# Altium PCB PCB.PcbDoc
Units mm, origin at the board's own origin, x right, y up, seen from the top; angles counter-clockwise.
Board outline 26 x 21 mm, 2 copper layers (Top Layer, Bottom Layer); 24 components, 29 nets, 106 pads, 15 vias.
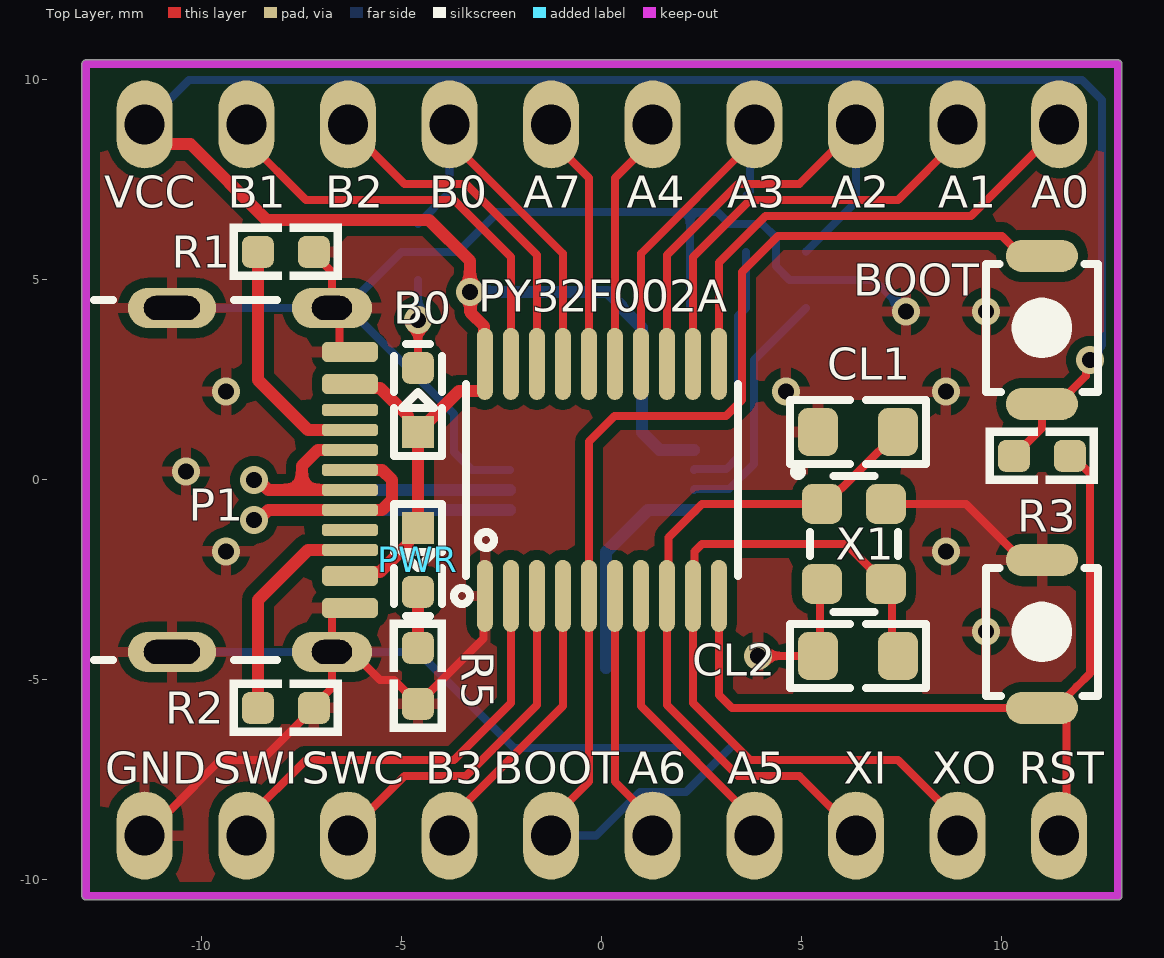
[diagram p0: Top Layer view]
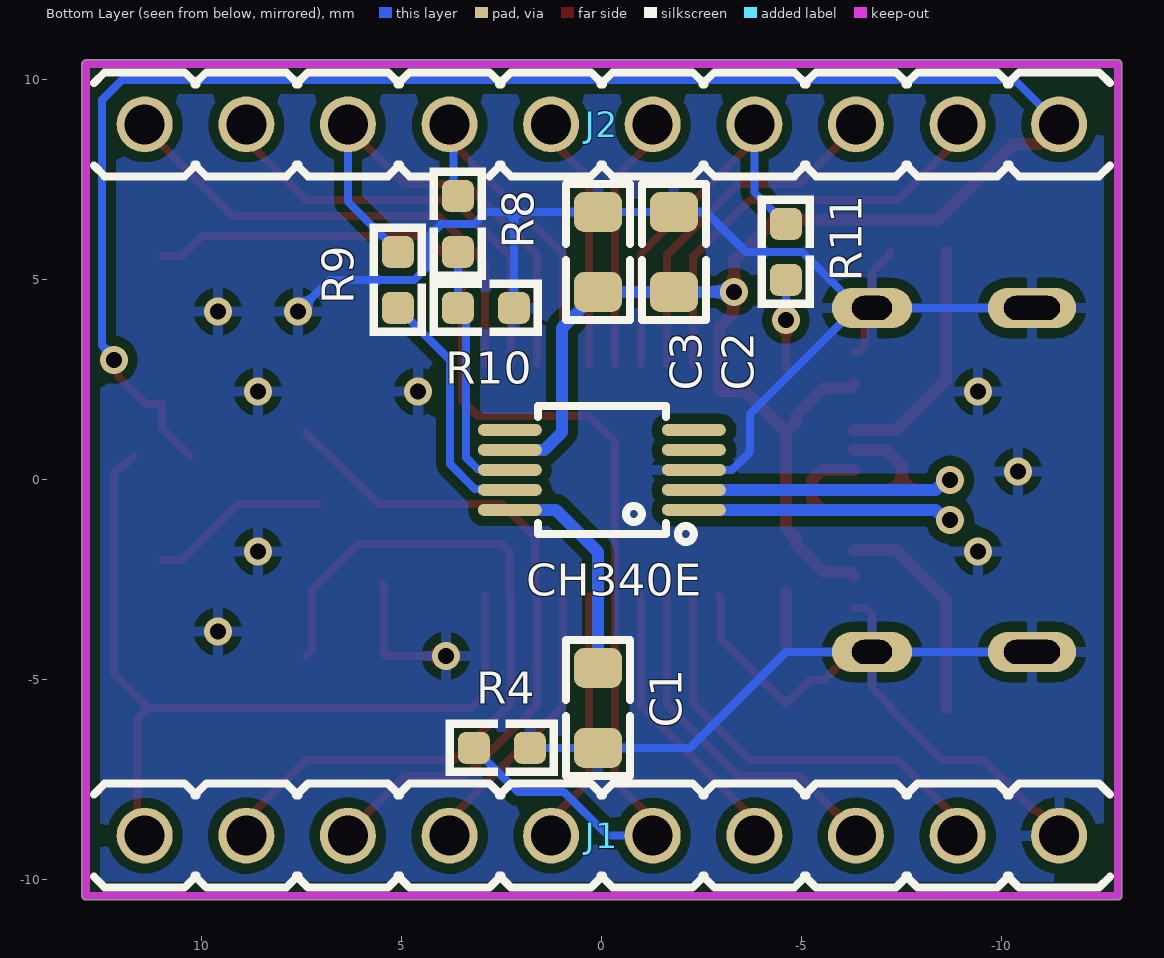
[diagram p1: Bottom Layer view, seen from below]
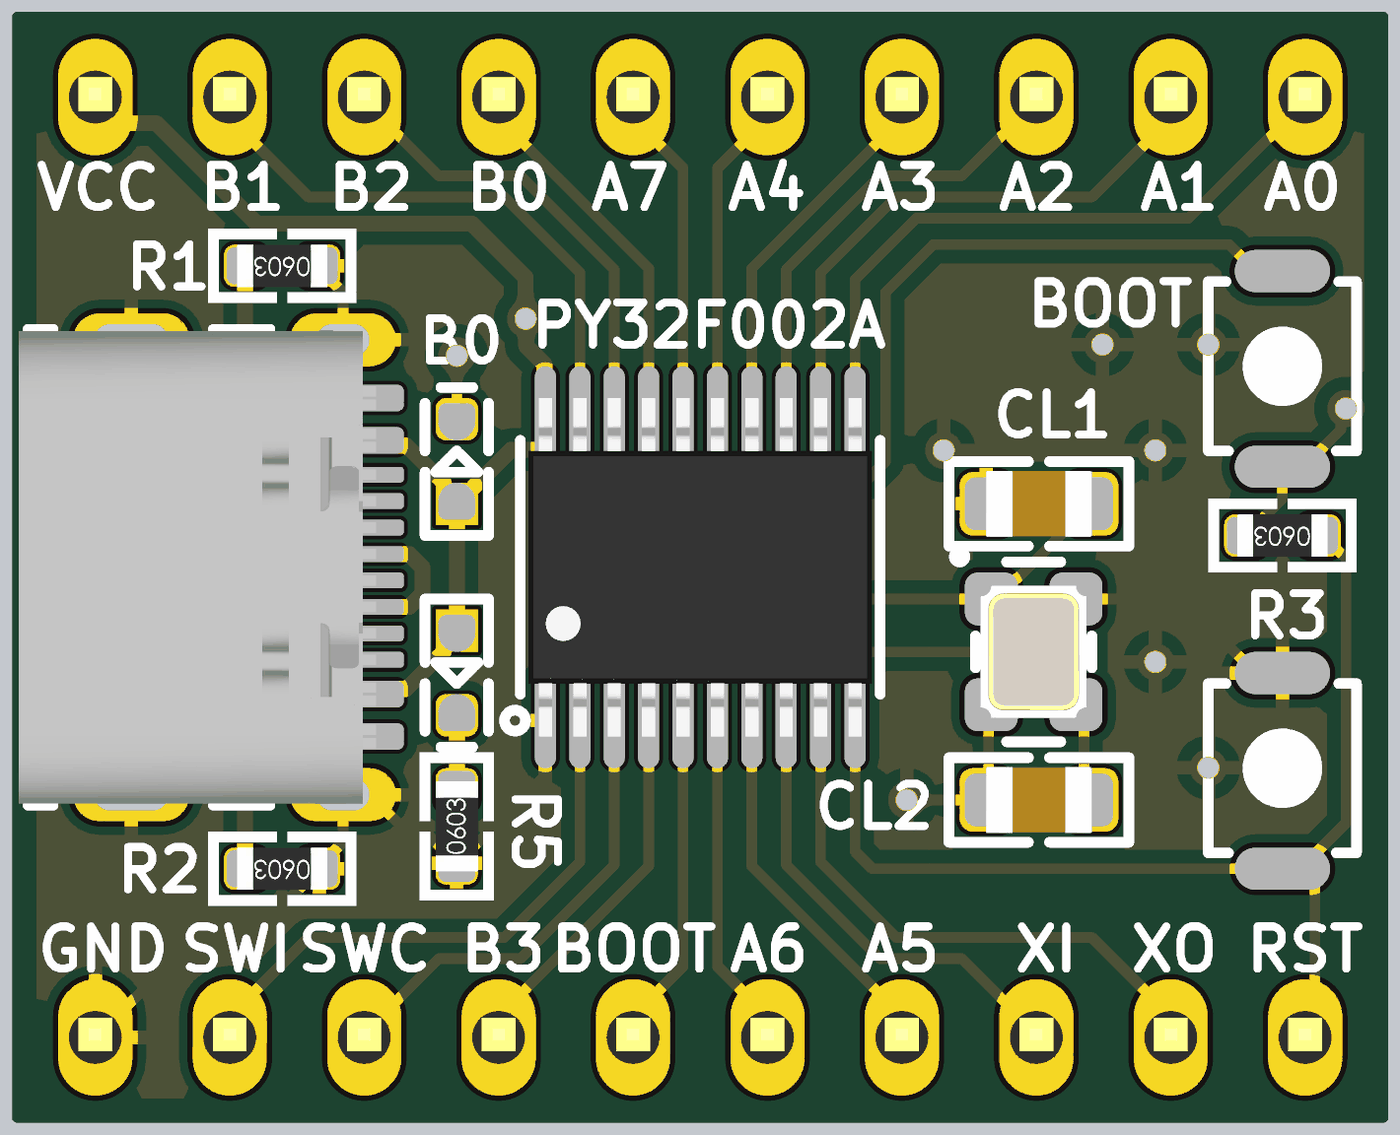
[diagram p2: 3D render of the assembled board from above, using the file's embedded part models]
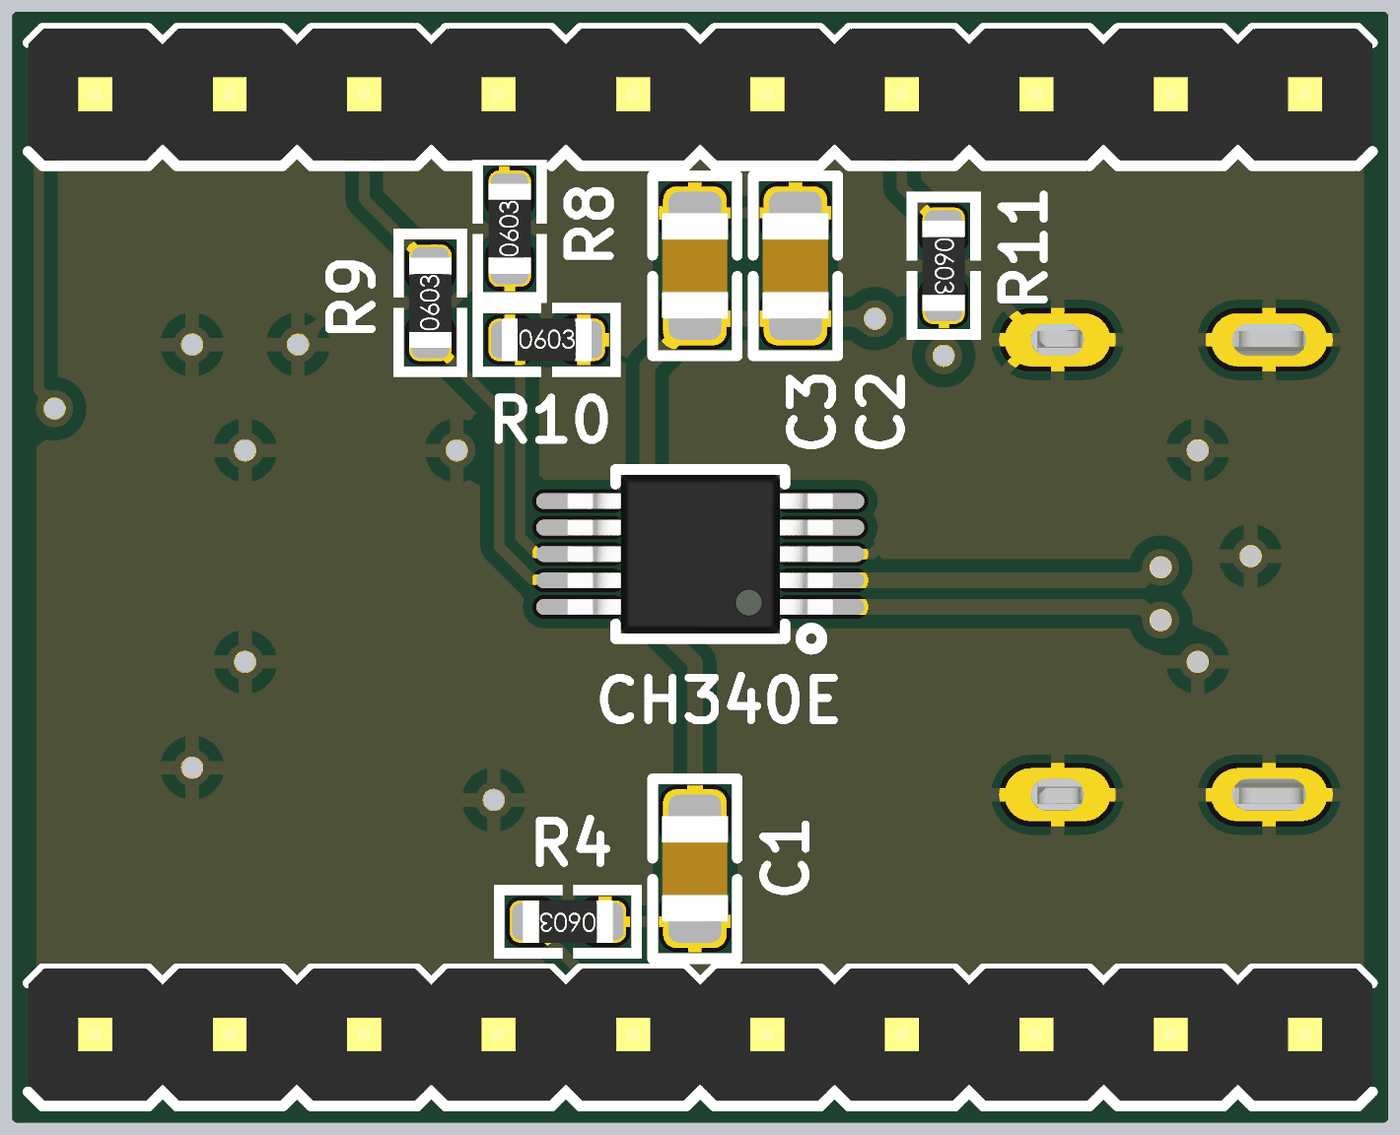
[diagram p3: 3D render of the assembled board from below, using the file's embedded part models]

## Layer stack, top to bottom
Top Solder: solder mask 0.0254, SM-001, Dk 4
Top Layer: signal copper 0.0356
Dielectric 1: dielectric 0.32, FR-4, Dk 4.8
Bottom Layer: signal copper 0.0356
Bottom Solder: solder mask 0.0254, SM-001, Dk 4

## Board outline
-13,-10.4 ccw(c-12.9,-10.4) -12.9,-10.5 12.9,-10.5 ccw(c12.9,-10.4) 13,-10.4 13,10.4 ccw(c12.9,10.4) 12.9,10.5 -12.9,10.5 ccw(c-12.9,10.4) -13,10.4

## Design rules (kind name [scope] priority, off if disabled: settings)
AcuteAngle [All] p1: minimum=9.00000000000000E+0001 checktracksonly=TRUE
BoardOutlineClearance [All] p1: gap=0.2 ignorepadtopadclearanceinfootprint=FALSE
Clearance Poly_Clearance [All vs InPolygon] p1: gap=0.25 ignorepadtopadclearanceinfootprint=TRUE except(0.3: Arc-Hole Track-Hole SMDPad-Hole THPad-Hole Via-Hole Fill-Hole Poly-Hole Region-Hole Text-Hole)
Clearance [All] p2: gap=0.2 ignorepadtopadclearanceinfootprint=TRUE except(0.3: Arc-Hole Track-Hole SMDPad-Hole THPad-Hole Via-Hole Fill-Hole Poly-Hole Region-Hole Text-Hole)
DiffPairsRouting [All] p1: maxlimit=0.254 minlimit=0.2 mostfreqgap=0.254 toplayer_minwidth=0.3 toplayer_maxwidth=0.381 toplayer_prefwidth=0.381 bottomlayer_minwidth=0.3 bottomlayer_maxwidth=0.381 bottomlayer_prefwidth=0.381 maxuncoupledlength=12.7
HoleSize [All] p1: absolutevalues=TRUE maxlimit=10 minlimit=0.4 maxpercent=80.000 minpercent=20.000
HoleToHoleClearance [All] p1: gap=0.3 allowstackedmicrovias=TRUE
MinimumAnnularRing [All] p1: minimumring=0.15
MinimumSolderMaskSliver [All] p1: minsoldermaskwidth=0.01
PolygonConnect [All] p1: connectstyle=Relief reliefconductorwidth=0.254 reliefentries=4 polygonreliefangle="90 Angle" airgapwidth=0.254
RoutingVias [All] p1: holewidth=0.4 width=0.7 viastyle="Through Hole" minholewidth=0.4 minwidth=0.7 maxholewidth=3 maxwidth=6
SilkToSolderMaskClearance [IsPad] p1: minsilkscreentomaskgap=0.01 clearancetoexposedcopper=TRUE
SolderMaskExpansion [All] p1: expansion=0.102 istentingtop=FALSE
SupplyNets "Schematic Supply Nets_1" [InNet('GND')] p1: voltage=0.000
SupplyNets "Schematic Supply Nets" [InNet('5V0')] p2: voltage=0.000
Width [All] p1: maxlimit=1 minlimit=0.2 preferedwidth=0.7
25 further rules are at their usual default settings.

## Classes and differential pairs
differential pair USBD: +USBD_P -USBD_N

## Components (designator, comment, footprint, x,y, rotation, side; value= is the part's Value field where it differs from the comment)
B0 "LED603RED" LED0603RED -4.6,2 r90 top (schematic designator PB0)
BOOT "PUSHBUTTON" SWPBS_SPST_3X2X1 11,3.8 r270 top
C1 "100nF" C0805 0.1,-5.7 r270 bottom
C2 "10nF" C0805 -1.8,5.7 r270 bottom
C3 "100nF" C0805 0.1,5.7 r270 bottom
CH340E "CH340E" SOG50_10 0,0.25 r0 bottom (schematic designator U2)
CL1 "20pF" C0805 6.4,1.2 r0 top
CL2 "20pF" C0805 6.4,-4.4 r0 top
J1 "HDR1X10" HDR_M_1X10 0,-8.89 r0 bottom value=HDRM10
J2 "HDR1X10" HDR_M_1X10 0,8.89 r0 bottom value=HDRM10
P1 "USBC_SMD_16" USBC_SMD_16_2171790001 -6.3,0 r90 top
PWR "LED603RED" LED0603RED -4.6,-2 r270 top
PY32F002A "PY32F002A" SOG65_20 0,0 r90 top (schematic designator U1)
R1 "5.1K" R0603 -7.9,5.7 r180 top
R2 "5.1K" R0603 -7.9,-5.7 r180 top
R3 "10K" R0603 11,0.6 r180 top
R4 "10K" R0603 2.5,-6.7 r0 bottom
R5 "1K" R0603 -4.6,-4.9 r90 top
R8 "1K" R0603 3.6,6.4 r90 bottom
R9 "1K" R0603 5.1,5 r90 bottom
R10 "1.8K" R0603 2.9,4.3 r180 bottom
R11 "1K" R0603 -4.6,5.7 r270 bottom
RST "PUSHBUTTON" SWPBS_SPST_3X2X1 11,-3.8 r270 top (schematic designator RESET)
X1 "16MHz" XTL_4_2520 6.3,-1.6 r0 top

## Footprints (in the part's own frame and the unit in brackets; to place one, negate y for a bottom-side part, rotate by r counter-clockwise, add the part's x,y. Pads: shape width x height; smd on the part's side, far side on the other; paste and mask are expansions set on the pad)
C0805 [mm] "CHIP Capacitor, 2.0X1.3mm, 0805"
  rrect50% 1x1.2 smd paste-0.1 mask+0.075: 1(-1,0) 2(1,0)
  Top Layer pour cut-out: -0.5,0.8 0.5,0.8 0.5,-0.8 -0.5,-0.8
  silkscreen extent -1.7,-0.8 1.7,0.8, body extent -1,-0.63 1,0.63, height 1
HDR_M_1X10 [mm] "Connector; Header; 10 Position"
  round 1.4 / inner round 1.4 / far side oval 1.4x2.2 hole 1 mask+0.1: 1(-11.43,0) 2(-8.89,0) 3(-6.35,0) 4(-3.81,0) 5(-1.27,0) 6(1.27,0) 7(3.81,0) 8(6.35,0) 9(8.89,0) 10(11.43,0)
  silkscreen extent -12.7,-1.3 12.7,1.3, body extent -12.7,-1.3 12.7,1.19, height 8.54
LED0603RED [mm] "LED SMD 0603, RED"
  rect 0.8x0.8 smd paste-5 mask+0.075: 1(-0.8,0)
  rrect50% 0.8x0.8 smd paste-5 mask+0.075: 2(0.8,0)
  silkscreen extent -1.4,-0.6 1.4,0.6, body extent -0.8,-0.4 0.8,0.4, height 0.5
R0603 [mm] "CHIP Resistor 1/10 WATT, 1.6x0.8mm, 0603, OPTIMIZED"
  rrect50% 0.8x0.8 smd paste-5 mask+0.075: 1(-0.7,0) 2(0.7,0)
  Top Layer pour cut-out: -0.5,0.4 0.5,0.4 0.5,-0.4 -0.5,-0.4
  silkscreen extent -1.4,-0.7 1.4,0.7, body extent -0.85,-0.4 0.85,0.4, height 0.56
SOG50_10 [mm] "MSSOP10, 3X3mm 0.5mm pitch, DGS, MSOP10, 10uSOP/usop10 (Dallas), MO-187BA(JEDEC)"
  oval 1.6x0.3 smd mask+0.075: 1(-2.3,1) 2(-2.3,0.5) 3(-2.3,0) 4(-2.3,-0.5) 5(-2.3,-1) 6(2.3,-1) 7(2.3,-0.5) 8(2.3,0) 9(2.3,0.5) 10(2.3,1)
  silkscreen extent -2.3,-1.6 1.6,1.8, body extent -2.51,-1.5 2.51,1.5, height 1.05
SOG65_20 [mm] "PW TSSOP (TI), MO-153-AC (JEDEC), 20Lead, pitch: 0.65mm, 6.5x4.4x1.2mm"
  oval 1.8x0.4 smd mask+0.075: 1(-2.9,2.925) 2(-2.9,2.275) 3(-2.9,1.625) 4(-2.9,0.975) 5(-2.9,0.325) 6(-2.9,-0.325) 7(-2.9,-0.975) 8(-2.9,-1.625) 9(-2.9,-2.275) 10(-2.9,-2.925) 11(2.9,-2.925) 12(2.9,-2.275) 13(2.9,-1.625) 14(2.9,-0.975) 15(2.9,-0.325) 16(2.9,0.325) 17(2.9,0.975) 18(2.9,1.625) 19(2.9,2.275) 20(2.9,2.925)
  silkscreen extent -3.1,-3.4 2.4,3.7, body extent -3.2,-3.25 3.2,3.25, height 1.2
SWPBS_SPST_3X2X1 [mm] "SWITCH, PUSHBUTTON, SMD, SPST, 3X2.5mm"
  oval 0.8x1.8 smd mask+0.1: 1(-1.8,0) 2(1.9,0)
  silkscreen extent -1.6,-1.4 1.6,1.4, body extent -2,-1.25 2,1.25, height 1.6
USBC_SMD_16_2171790001 [mm] "CONN, USB, Type C, 2171790001"
  rrect50% 0.5x1.4 smd mask+0.075: A1B12(3.2,0) A4B9(2.4,0) B1A12(-3.2,0) B4A9(-2.4,0)
  rrect50% 0.3x1.4 smd mask+0.075: A5(1.25,0) A6(0.25,0) A7(-0.25,0) A8(-1.25,0) B5(-1.75,0) B6(-0.75,0) B7(0.75,0) B8(1.75,0)
  oval 1x2.2 hole 0.6 slot 1.4 at 90 deg: SH1(-4.3,4.45) SH2(4.3,4.45)
  oval 1x2 hole 0.6 slot 1 at 90 deg: SH3(-4.3,0.45) SH4(4.3,0.45)
  silkscreen extent -4.5,1.83 4.5,6.4, body extent -4.47,-0.17 4.47,6.58, height 3.27
XTL_4_2520 [mm] "CRYSTAL OSCILATOR 2.5X2.0mm, ABM10, CDFN-4, ASDM"
  rrect50% 1x1 smd: 1(-0.8,1) 2(-0.8,-1) 3(0.8,-1) 4(0.8,1)
  Top Layer pour cut-out: -1.4,1.6 -1.4,-1.6 1.4,-1.6 1.4,1.6
  silkscreen extent -1.5,-1.7 1.1,1.9, body extent -1,-1.25 1,1.25, height 0.8

## Part data
B0 PWR: library part LED_SMD_0603_RED, "LED, SMD, 0603, RED", ASSEMBLY=ASSEMBLY, DESC=DESCRIPTION, MANF=MANF, MANF_P#=MANF_PART#, PARAM="30mA, 640nm", PARAM2=1.8~2.5V, PRICE=PRICE
BOOT RST: library part SWPBS_SPST_3X2_B3U-1000P, "SWITCH, PUSH BUTTON, TACTILE, SMD, SPST, 3X2.5X1.2mm", ASSEMBLY=ASSEMBLY, DESC=DESCRIPTION, MANF=OMRON, MANF_P#=B3U-1000P, PARAM=PARAM, PRICE=1$
C1 C2 C3 CL1 CL2: library part CAP_SMD_MLCC, "CAP, MLCC", ASSEMBLY=ASSEMBLY, DESC="CAP, MLCC, 1nF, 50V, C0G, 10%, 0402", MANF=Murata, MANF_P#=MANF_PART#, PARAM="C0G, 10%", PARAM2=50V, PRICE="100= 1$"
CH340E: library part CH340E_MSOP10, "USB-UART", Package=MSOP-10, MANF_P#=CH340E
J1 J2: library part HDR_M_1X10, "CONN, HEADER, Male, pitch: 2.54mm, 10POS"
P1: library part CONN_USBC_SMD_16_2171790001, "CONN, USB, Type C, USB 2.0, Right-Angle, SMD", MANF=MOLEX, MANF_P#=2171790001, PARAM=5A, PRICE=1.5$
PY32F002A: library part PY32F002AF15P6TU_TSSOP20, "MCU, PYUA32 ARM 32-bit, Cortex-M0+, 20KB FLASH, 3KB SRAM", Package=TSSOP-20, DESC="I2C, SPI, UART", MANF=PY, MANF_P#=PY32F002AF15P6TU, PARAM="20KB FLASH, 3KB SRAM, -40~85oC", PARAM2="2.4~3.6VCC, 48MHz, 1X12Bit ADC", PRICE=1$
R1 R2 R3 R4 R5 R8 R9 R10 R11: library part RES_SMD, "RESISTOR, SMD", ASSEMBLY=ASSEMBLY, DESC=DESCRIPTION, DIST#=MOUSER, MANF=-, MANF_P#=-, PARAM=-W, PARAM2=1%, PRICE="100= 0.5$"
X1: library part XTL_4_16MHz_2520, "Crystal 16MHz", MANF=ABRACON, MANF_P#=ABM10W-16.0000MHZ-4-D1X-T3, PARAM="10PPM, -40~85oC", PRICE=0.8$

## Via types
v1: diameter 0.7, hole 0.4, Top Layer to Bottom Layer, tented both sides, 15 vias

## Nets (pads, with @x,y where several pads share a name; then routed paths per layer and width w, separated by ;. In a path a pad name is that pad's centre, name@x,y a point inside that pad or via, vN(x,y) a via of type N, cw(c..) or ccw(c..) an arc to the next point about the centre after c; other vN are vias at no path point)
5V0: B0.1 BOOT.2 C2.2 C3.2 CH340E.7 J2.1 P1.A4B9 P1.B4A9 PWR.1 PY32F002A.20 R3.2 | length 65.5
  Top Layer w0.2: R3.2 11,1.3 BOOT.2 11.4,1.9 12.104,2.604 12.104,2.904 v1(12.2,3)
  Top Layer w0.3: J2.1 -10.935,8.395 -10.28,8.395 -8.385,6.5 -4.322,6.5 -3.3,5.478 v1(-3.3,4.7) ; P1.B4A9 -6.2,-2.3 -5.549,-2.3 -4.85,-1.601 -4.85,-1.45 PWR.1 B0.1 ; P1.A4B9 -6.2,2.3 -5.549,2.3 -4.85,1.601 -4.85,1.45 B0.1 ; v1@-3.322,4.722 v1(-3.3,4.7) ; B0.1 -3.575,2.225 -2.971,2.225 -2.925,2.271 PY32F002A.20 -2.944,2.919 -2.944,3.838 -3.287,4.181 -3.287,4.687 v1(-3.3,4.7)
  Bottom Layer w0.2: J2.1 -10.32,10 12,10 12.5,9.5 12.5,3.367 12.2,3.067 v1(12.2,3)
  Bottom Layer w0.3: v1(-3.3,4.7) C2.2 C3.2 0.146,4.7 0.488,4.358 0.488,4.312 1,3.8 1,1.193 1.443,0.75 CH340E.7
BOOT: BOOT.1 J1.5 PY32F002A.5 R4.2 | length 31.2
  Top Layer w0.2: J1.5 -1.27,-8.49 -0.325,-7.545 PY32F002A.5 -0.325,0.958 0.317,1.6 3.1,1.6 3.5,2 3.5,5.2 4.4,6.1 10,6.1 10.5,5.6 BOOT.1
  Bottom Layer w0.2: J1.5 -0.144,-8.89 0.946,-7.799 2.101,-7.799 R4.2
GND: C1.2 C2.1 C3.1 CH340E.3 CL1.1 CL2.1 J1.1 P1.A1B12 P1.B1A12 P1.SH1 P1.SH2 P1.SH3 P1.SH4 PY32F002A.1 R1.1 R2.1 R4.1 R5.1 R10.2 RST.1 X1.2 X1.4 | length 68.6
  Top Layer w0.2: J1.1 -11.43,-8.815 -10.876,-8.26 -10.8,-8.26 -9.54,-7 -8.5,-7 R2.1 -7.2,-5.646 -6.75,-5.196 P1.SH3 ; R1.1 -7.2,5.646 -6.75,5.196 P1.SH4 -6.562,4.113 -6.562,3.348 -6.414,3.2 P1.A1B12 ; P1.B1A12 -6.602,-3.2 -6.75,-3.348 P1.SH3 ; PY32F002A.1 -2.963,-2.938 -2.963,-3.963 R5.1 -5.2,-5 -5.55,-5 -6.25,-4.3 P1.SH3 ; v1(3.9,-4.4) CL2.1 5.45,-4.35 5.45,-2.65 X1.2 ; X1.4 9.1,-0.6 10.5,-2 RST.1
  Bottom Layer w0.2: P1.SH1 P1.SH3 -4.6,-4.3 -2.2,-6.7 C1.2 R4.1 ; P1.SH2 P1.SH4 P1.SH4@-6.407,4.3 ; CH340E.3 -3.25,0.25 -3.7,0.7 -3.7,1.65 -6.35,4.3 P1.SH4@-6.407,4.3 ; R10.2 2.2,6.7 ; v1(7.6,4.21) 6.81,5 4.693,5 4.35,5.343 4.35,6.057 4.007,6.4 3.193,6.4 2.893,6.7 2.2,6.7 ; P1.SH4@-6.407,4.3 -5.007,5.7 -3.6,5.7 -2.6,6.7 C2.1 C3.1 2.2,6.7
  other v1: 9.6,-3.79 -9.4,-1.79 8.6,-1.79 -10.4,0.21 -9.4,2.21 4.6,2.21 8.6,2.21 9.6,4.21
NetC1_1: C1.1 CH340E.10 | length 5.5
  Bottom Layer w0.3: C1.1 0.1,-1.8 1.15,-0.75 CH340E.10
NetP1_A5: P1.A5 R1.2 | length 6
  Top Layer w0.3: R1.2 -8.6,2.5 -7.35,1.25 P1.A5
NetP1_B5: P1.B5 R2.2 | length 5.5
  Top Layer w0.3: R2.2 -8.6,-3 -7.35,-1.75 P1.B5
NetPB0_2: B0.2 R11.2 | length 2.2
  Top Layer w0.2: B0.2 v1(-4.6,4)
  Bottom Layer w0.2: v1(-4.6,4) R11.2
NetPWR_2: PWR.2 R5.2 | length 1.4
  Top Layer w0.3: R5.2 PWR.2
NetR8_1: CH340E.8 R8.1 R10.1 | length 6.4
  Bottom Layer w0.2: CH340E.8 2.319,0.269 3.106,0.269 3.4,0.564 3.4,4.1 R10.1 R8.1
NetR9_1: CH340E.9 R9.1 | length 6.2
  Bottom Layer w0.2: CH340E.9 2.319,-0.231 3.171,-0.231 3.8,0.398 3.8,3 R9.1
OSC_IN: CL1.2 J1.8 PY32F002A.8 X1.1 | length 17.2
  Top Layer w0.2: J1.8 6.35,-8.815 4.935,-7.4 3.4,-7.4 1.625,-5.625 PY32F002A.8 1.663,-2.862 1.663,-1.437 2.5,-0.6 5.581,-0.6 5.97,-0.211 5.989,-0.211 6.911,0.711 6.93,0.711 7.4,1.181 CL1.2
OSC_OUT: CL2.2 J1.9 PY32F002A.9 X1.3 | length 19.2
  Top Layer w0.2: CL2.2 7.25,-4.25 7.25,-2.75 X1.3 6.1,-1.6 2.5,-1.6 2.313,-1.787 2.313,-2.862 PY32F002A.9 2.275,-5.575 3.7,-7 7.4,-7 8.89,-8.49 J1.9
PA0: J2.10 PY32F002A.11 | length 12.5
  Top Layer w0.2: PY32F002A.11 2.925,5.435 4.09,6.6 9.23,6.6 11.43,8.8 J2.10
PA1: J2.9 PY32F002A.12 | length 10.9
  Top Layer w0.2: PY32F002A.12 2.275,5.575 3.7,7 7.4,7 8.89,8.49 J2.9
PA2: J2.8 PY32F002A.13 R9.2 | length 12.5
  Top Layer w0.2: PY32F002A.13 1.625,5.625 3.4,7.4 4.935,7.4 6.35,8.815 J2.8
  Bottom Layer w0.2: R9.2@5.1,5.707 6.35,6.957 J2.8
PA3: J2.7 PY32F002A.14 R8.2 | length 9
  Top Layer w0.2: PY32F002A.14 0.975,5.655 3.81,8.49 J2.7
  Bottom Layer w0.2: R8.2 3.705,7.205 3.705,8.785 J2.7
PA4: J2.6 PY32F002A.15 | length 6.4
  Top Layer w0.2: PY32F002A.15 0.325,7.545 1.27,8.49 J2.6
PA5: J1.7 PY32F002A.7 | length 7.2
  Top Layer w0.2: PY32F002A.7 0.975,-5.655 3.81,-8.49 J1.7
PA6: J1.6 PY32F002A.6 | length 6.4
  Top Layer w0.2: PY32F002A.6 0.325,-7.545 1.27,-8.49 J1.6
PA7: J2.5 PY32F002A.16 | length 6.4
  Top Layer w0.2: J2.5 -1.27,8.49 -0.325,7.545 PY32F002A.16
PB0: J2.4 PY32F002A.17 R11.1 | length 10
  Top Layer w0.2: J2.4 -3.81,8.49 -0.975,5.655 PY32F002A.17
  Bottom Layer w0.2: R11.1 -3.81,7.19 J2.4
PB1: J2.2 PY32F002A.19 | length 10.9
  Top Layer w0.2: J2.2 -8.89,8.49 -7.4,7 -3.7,7 -2.275,5.575 PY32F002A.19
PB2: J2.3 PY32F002A.18 | length 8.8
  Top Layer w0.2: J2.3 -6.35,8.815 -4.935,7.4 -3.4,7.4 -1.625,5.625 PY32F002A.18
PB3: J1.4 PY32F002A.4 | length 7.2
  Top Layer w0.2: J1.4 -3.81,-8.49 -0.975,-5.655 PY32F002A.4
RST: J1.10 PY32F002A.10 R3.1 RST.2 | length 21.3
  Top Layer w0.2: PY32F002A.10 2.925,-5.373 3.252,-5.7 RST.2 RST.2@11.338,-5.7 ; J1.10 11.615,-8.705 11.615,-5.977 RST.2@11.338,-5.7 ; R3.1 11.938,0.362 12.001,0.362 12.2,0.162 12.2,-4.838 11.869,-5.169 RST.2@11.338,-5.7
SWCL: J1.3 PY32F002A.3 | length 8.8
  Top Layer w0.2: J1.3 -6.35,-8.815 -4.935,-7.4 -3.4,-7.4 -1.625,-5.625 PY32F002A.3
SWIO: J1.2 PY32F002A.2 | length 10.9
  Top Layer w0.2: J1.2 -8.89,-8.49 -7.4,-7 -3.7,-7 -2.275,-5.575 PY32F002A.2
USBD_N: CH340E.2 P1.A7 P1.B7 | length 11
  Top Layer w0.3: v1(-8.7,0) -8.592,0 -8.342,-0.25 -7.5,-0.25 ; P1.A7 -7.5,-0.25 ; P1.B7 -7.101,0.75 -7.5,0.351 -7.5,-0.25
  Bottom Layer w0.3: v1(-8.7,0) -8.592,0 -8.342,-0.25 CH340E.2
USBD_P: CH340E.1 P1.A6 P1.B6 | length 11.8
  Top Layer w0.3: v1(-8.7,-1) -8.592,-1 -8.342,-0.75 P1.B6 -5.499,-0.75 -5.25,-0.501 -5.25,0.001 -5.499,0.25 P1.A6
  Bottom Layer w0.3: v1(-8.7,-1) -8.592,-1 -8.342,-0.75 CH340E.1
pads on no net: CH340E.4 CH340E.5 CH340E.6 P1.A8 P1.B8

## Polygon pours and split planes (outlines as drawn)
GND on Bottom Layer "NONET_L-01_P-001" (solid, remove dead copper, pour order 1): -12.9,10.4 12.9,10.4 12.9,-10.4 -12.9,-10.4
GND on Top Layer "NONET_L-01_P-001" (solid, remove dead copper, pour order 0): -12.9,10.4 12.9,10.4 12.9,-10.4 -12.9,-10.4

## Keep-outs
Keep-Out Layer:
  lines w0.2: -12.9,-10.4 -12.9,10.4 12.9,10.4 12.9,-10.4 -12.9,-10.4

## Silkscreen, mask and mechanical layers (free items; w line width, h text height)
Top Overlay:
  text "VCC" at -12.44,6.8 h0.8
  text "B1" at -9.351,6.8 h0.8
  text "B2" at -6.923,6.8 h0.8
  text "B0" at -4.323,6.8 h0.8
  text "A7" at -1.965,6.8 h0.8
  text "A4" at 0.616,6.8 h0.8
  text "A3" at 3.135,6.8 h0.8
  text "A2" at 5.735,6.8 h0.8
  text "A1" at 8.407,6.8 h0.8
  text "A0" at 10.735,6.8 h0.8
  text "GND" at -12.421,-7.6 h0.8
  text "SWI" at -9.717,-7.6 h0.8
  text "SWC" at -7.503,-7.6 h0.8
  text "B3" at -4.423,-7.6 h0.8
  text "BOOT" at -2.719,-7.6 h0.8
  text "A6" at 0.654,-7.6 h0.8
  text "A5" at 3.135,-7.6 h0.8
  text "XI" at 6.044,-7.6 h0.8
  text "XO" at 8.239,-7.6 h0.8

## Text inside footprints (layer, text, board x,y; h text height)
P1: Mechanical 13 "PCB EDGE" at -13.3,-6 h0.8 r90